# Altium PCB CH32V307VC-SIZE-M.PcbDoc
Units mil, origin at the board's own origin, x right, y up, seen from the top; angles counter-clockwise.
Board outline 2461 x 1760 mil, 2 copper layers (Top Layer, Bottom Layer), stack 12.8 mil thick; 25 components, 0 nets, 315 pads, 0 vias.
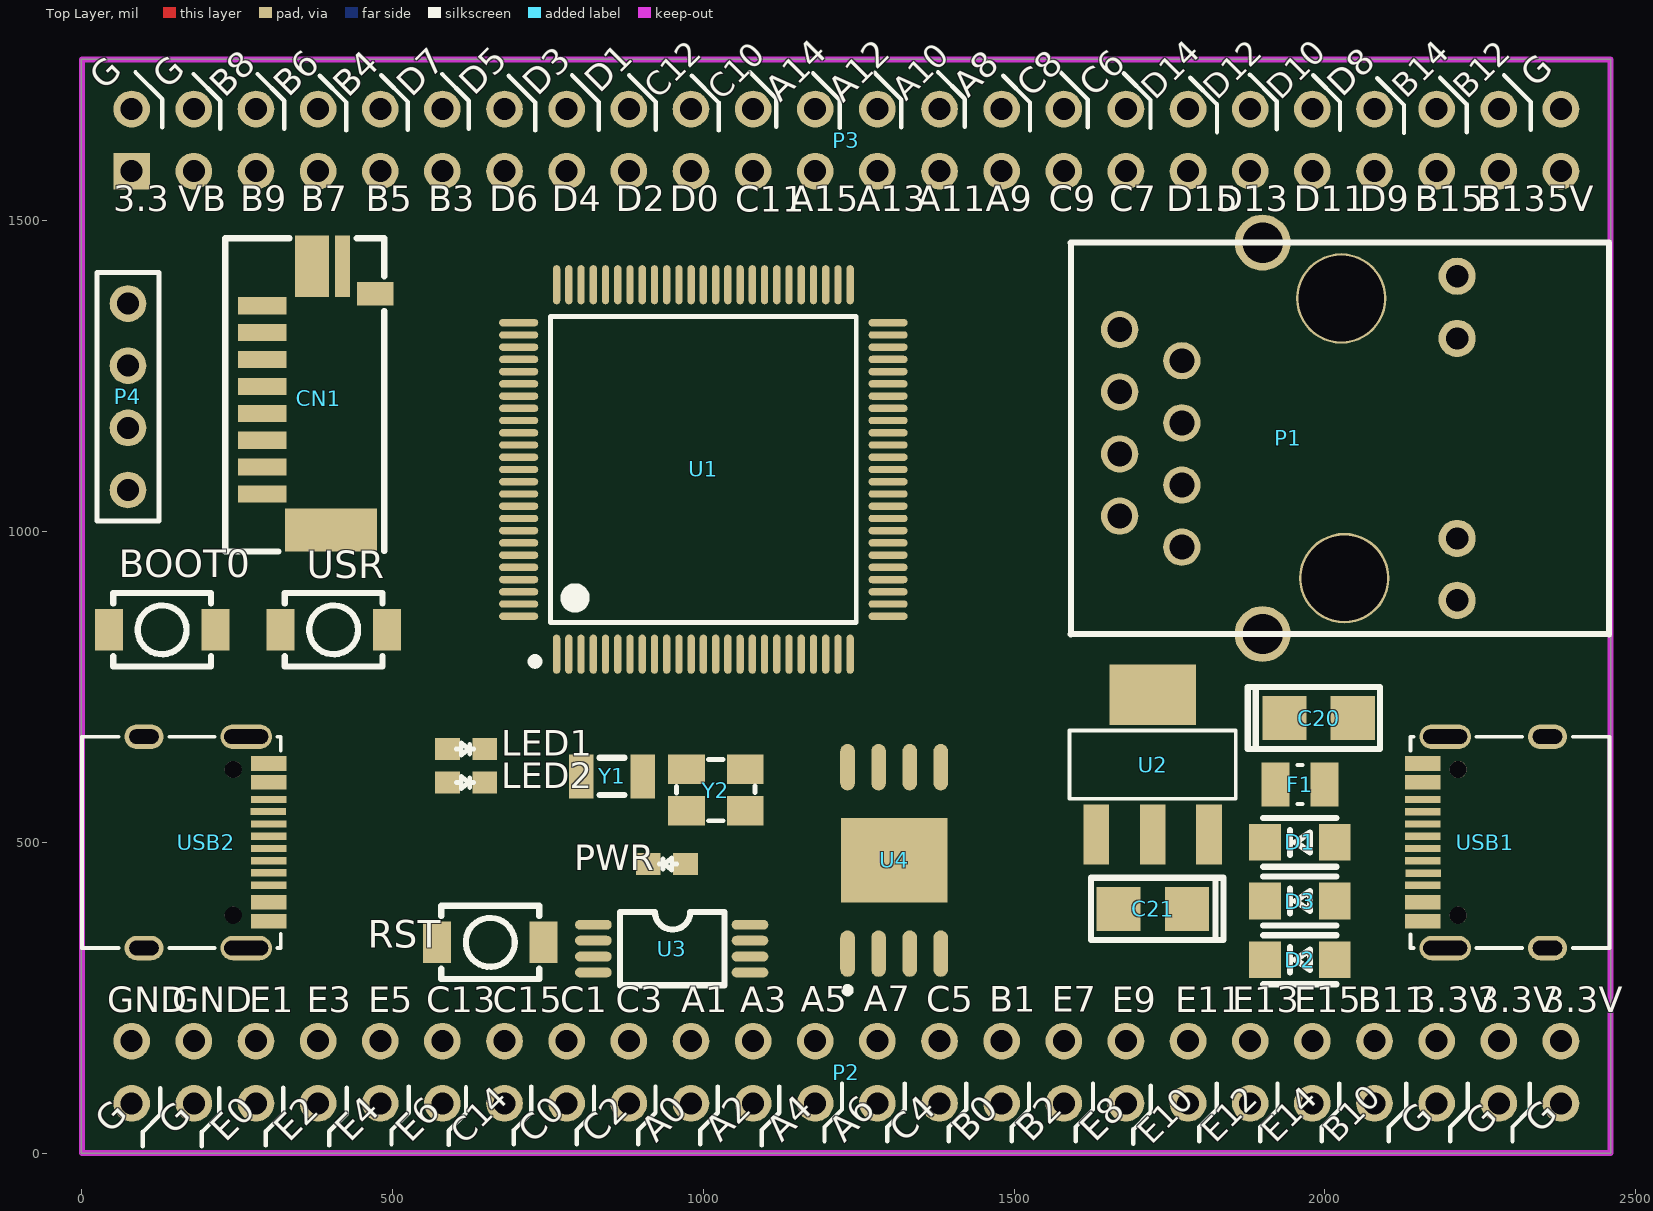
[diagram p0: Top Layer view]
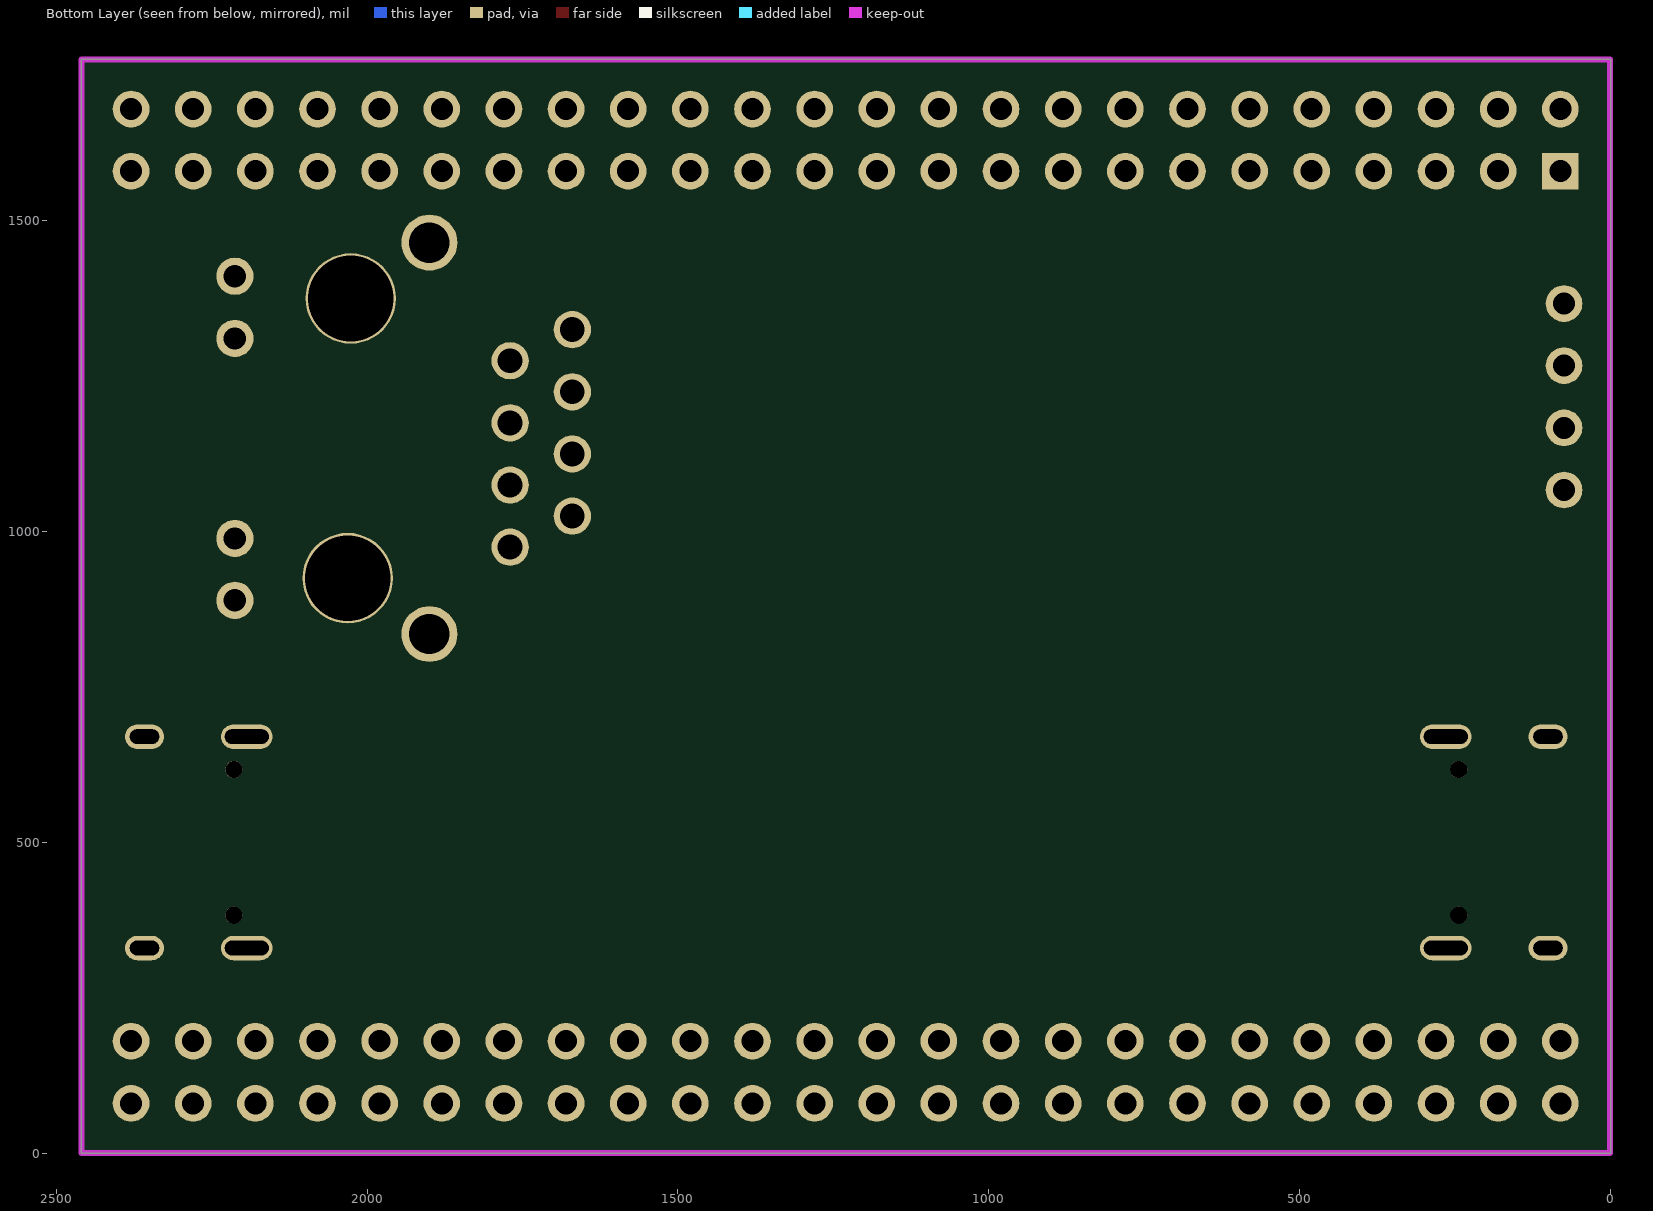
[diagram p1: Bottom Layer view, seen from below]

## Layer stack, top to bottom
Top Solder: solder mask 0.4, Solder Resist, Dk 3.5
Top Layer: signal copper 1.4
Dielectric 1: core 10, FR-4, Dk 4.2
Bottom Layer: signal copper 1.4
Bottom Solder: solder mask 0.4, Solder Resist, Dk 3.5

## Board outline
2207,0 -1,0 -1,627 -1,1760 543,1760 2460,1760 2460,0

## Design rules (kind name [scope] priority, off if disabled: settings)
Clearance [All] p1: gap=6 ignorepadtopadclearanceinfootprint=FALSE
ComponentClearance [All] p1: gap=0 collisioncheckmode=3 verticalgap=0 showdistances=FALSE
HoleToHoleClearance [All] p1: gap=0 allowstackedmicrovias=TRUE
Length "InNet('FMC_A3') Or InNet('FMC_A1')" [InNet('FMC_A3') Or InNet('FMC_A1')] p1: maxlimit=2088.86 minlimit=2000
MinimumSolderMaskSliver [All] p1: minsoldermaskwidth=0
PolygonConnect [(InPadClass('All Pads'))] p1: connectstyle=Relief reliefconductorwidth=20 reliefentries=4 polygonreliefangle="90 Angle" airgapwidth=10
PolygonConnect PolygonConnect_1 [All] p2: connectstyle=Direct reliefconductorwidth=10 reliefentries=4 polygonreliefangle="90 Angle" airgapwidth=10
RoutingVias [All] p1: holewidth=28 width=50 viastyle="Through Hole" minholewidth=28 minwidth=50 maxholewidth=28 maxwidth=50
SilkToSilkClearance [All] p1: silktosilkclearance=0
SilkToSolderMaskClearance [IsPad] p1: minsilkscreentomaskgap=0 clearancetoexposedcopper=TRUE
SolderMaskExpansion [All] p1: expansion=4 istentingtop=FALSE
Width [All] p1: maxlimit=50 minlimit=7 preferedwidth=10
25 further rules are at their usual default settings.

## Classes and differential pairs
component class CH32V307VC: BOOT0 CN1 LED1 LED2 P1 P2 P3 P4 PWR RST U1 U2 U3 U4 USB1 USB2 USR Y1 Y2

## Components (designator, comment, footprint, x,y, rotation, side; value= is the part's Value field where it differs from the comment)
BOOT0 "ST-1185S" SW-SMD_ST-1185S 129,842 r0 top
C20 "10uF ±20% 16V" A 1990,700 r180 top
C21 "22uF ±20% 16V" A 1723,393 r0 top
CN1 "MicroSD" MOLEX-SD-105027-PKG 380,1220 r90 top locked
D1 "SM4007PL" SOD-123FL 1960,500 r180 top
D2 "SM4007PL" SOD-123FL 1960,311 r180 top
D3 "SM4007PL" SOD-123FL 1960,405.5 r180 top
F1 "MF-MSMF050-2 500mA" F0805 1960,593 r0 top
LED1 "LED-R" LED0603 618.31,650 r0 top
LED2 "LED-G" LED0603 618.31,596.13 r0 top
P1 "HR911105A" RJ45A 1770,975 r90 top locked
P2 "Header 24X2" HDR2X24#1 80,80 r0 top locked
P3 "Header 24X2" HDR2X24#2 80,1580 r0 top locked
P4 "4P,SWD" HDR1X4 74,1367 r270 top
PWR "LED-R" LED0603 941.08,465 r180 top
RST "ST-1185S" SW-SMD_ST-1185S 657,339 r0 top
U1 "CH32V307VCT6" LQFP-100_L14.0-W14.0-P0.50-LS16.0-BL 1000,1100 r0 top locked
U2 "AMS1117-33" SOT-223_L6.5-W3.5-P2.30-LS7.0-BR 1723,625 r270 top
U3 "FT24C32A-ETR-T" TSSOP-8_L4.4-W3.0-P0.65-LS6.4-BL-2 949,329 r270 top
U4 "W25Qxxx" VSOP-8 1307,471 r90 top locked
USB1 "TYPEC-304-BCP16" USB-C-SMD_TYPEC-304-BCP16 2258,500 r90 top locked
USB2 "TYPEC-304-BCP16" USB-C-SMD_TYPEC-304-BCP16 200,500 r270 top locked
USR "ST-1185S" SW-SMD_ST-1185S 405,842 r180 top
Y1 "32.768kHz" FC-135R_L3.2-W1.5 853,606 r180 top
Y2 "8MHz" 3225-4p 1020,584 r0 top

## Footprints (in the part's own frame and the unit in brackets; to place one, negate y for a bottom-side part, rotate by r counter-clockwise, add the part's x,y. Pads: shape width x height; smd on the part's side, far side on the other; paste and mask are expansions set on the pad)
3225-4p [mm]
  rect 1.5x1.2 smd: 1(-1.2,-0.85) 2(1.2,-0.85) 3(1.2,0.85) 4(-1.2,0.85)
  silkscreen extent -1.6,-1.25 1.6,1.25
A [mm]
  rect 1.8x1.8 smd: 1(1.397,0) 2(-1.397,0)
  silkscreen extent -2.51,-1.27 2.9,1.27
F0805 [mm] "0805 / 1.45mm height"
  rect 1.15x1.8 smd: 1(-1,0) 2(1,0)
  silkscreen extent -0.1,-0.8 0.1,0.8
FC-135R_L3.2-W1.5 [mm]
  rect 1x1.8 smd: 1(-1.25,0) 2(1.25,0)
  silkscreen extent -0.51,-0.76 0.51,0.76
HDR1X4 [mm] "Connector; Header; 4 Position"
  round 1.5 hole 0.9: 1(0,0) 2(2.54,0) 3(5.08,0) 4(7.62,0)
  silkscreen extent -1.27,-1.27 8.89,1.27
HDR2X24#1 [mm] "Connector; Header; 24x2 Position"
  round 1.5 hole 0.9: 1(0,0) 2(0,2.54) 3(2.54,0) 4(2.54,2.54) 5(5.08,0) 6(5.08,2.54) 7(7.62,0) 8(7.62,2.54) 9(10.16,0) 10(10.16,2.54) 11(12.7,0) 12(12.7,2.54) 13(15.24,0) 14(15.24,2.54) 15(17.78,0) 16(17.78,2.54) 17(20.32,0) 18(20.32,2.54) 19(22.86,0) 20(22.86,2.54) 21(25.4,0) 22(25.4,2.54) 23(27.94,0) 24(27.94,2.54) 25(30.48,0) 26(30.48,2.54) 27(33.02,0) 28(33.02,2.54) 29(35.56,0) 30(35.56,2.54) 31(38.1,0) 32(38.1,2.54) 33(40.64,0) 34(40.64,2.54) 35(43.18,0) 36(43.18,2.54) 37(45.72,0) 38(45.72,2.54) 39(48.26,0) 40(48.26,2.54) 41(50.8,0) 42(50.8,2.54) 43(53.34,0) 44(53.34,2.54) 45(55.88,0) 46(55.88,2.54) 47(58.42,0) 48(58.42,2.54)
HDR2X24#2 [mm] "Connector; Header; 24x2 Position"
  rect 1.5x1.5 hole 0.9: 1(0,0)
  round 1.5 hole 0.9: 2(0,2.54) 3(2.54,0) 4(2.54,2.54) 5(5.08,0) 6(5.08,2.54) 7(7.62,0) 8(7.62,2.54) 9(10.16,0) 10(10.16,2.54) 11(12.7,0) 12(12.7,2.54) 13(15.24,0) 14(15.24,2.54) 15(17.78,0) 16(17.78,2.54) 17(20.32,0) 18(20.32,2.54) 19(22.86,0) 20(22.86,2.54) 21(25.4,0) 22(25.4,2.54) 23(27.94,0) 24(27.94,2.54) 25(30.48,0) 26(30.48,2.54) 27(33.02,0) 28(33.02,2.54) 29(35.56,0) 30(35.56,2.54) 31(38.1,0) 32(38.1,2.54) 33(40.64,0) 34(40.64,2.54) 35(43.18,0) 36(43.18,2.54) 37(45.72,0) 38(45.72,2.54) 39(48.26,0) 40(48.26,2.54) 41(50.8,0) 42(50.8,2.54) 43(53.34,0) 44(53.34,2.54) 45(55.88,0) 46(55.88,2.54) 47(58.42,0) 48(58.42,2.54)
LED0603 [mil]
  rect 40x35 smd: 1(-29.92,0) 2(29.92,0)
  silkscreen extent -16,-10 12,10
LQFP-100_L14.0-W14.0-P0.50-LS16.0-BL [mm]
  oval 0.3x1.6 smd: 1(-6,-7.55) 2(-5.5,-7.55) 3(-5,-7.55) 4(-4.5,-7.55) 5(-4,-7.55) 6(-3.5,-7.55) 7(-3,-7.55) 8(-2.5,-7.55) 9(-2,-7.55) 10(-1.5,-7.55) 11(-1,-7.55) 12(-0.5,-7.55) 13(0,-7.55) 14(0.5,-7.55) 15(1,-7.55) 16(1.5,-7.55) 17(2,-7.55) 18(2.5,-7.55) 19(3,-7.55) 20(3.5,-7.55) 21(4,-7.55) 22(4.5,-7.55) 23(5,-7.55) 24(5.5,-7.55) 25(6,-7.55) 51(6,7.55) 52(5.5,7.55) 53(5,7.55) 54(4.5,7.55) 55(4,7.55) 56(3.5,7.55) 57(3,7.55) 58(2.5,7.55) 59(2,7.55) 60(1.5,7.55) 61(1,7.55) 62(0.5,7.55) 63(0,7.55) 64(-0.5,7.55) 65(-1,7.55) 66(-1.5,7.55) 67(-2,7.55) 68(-2.5,7.55) 69(-3,7.55) 70(-3.5,7.55) 71(-4,7.55) 72(-4.5,7.55) 73(-5,7.55) 74(-5.5,7.55) 75(-6,7.55)
  oval 1.6x0.3 smd: 26(7.55,-6) 27(7.55,-5.5) 28(7.55,-5) 29(7.55,-4.5) 30(7.55,-4) 31(7.55,-3.5) 32(7.55,-3) 33(7.55,-2.5) 34(7.55,-2) 35(7.55,-1.5) 36(7.55,-1) 37(7.55,-0.5) 38(7.55,0) 39(7.55,0.5) 40(7.55,1) 41(7.55,1.5) 42(7.55,2) 43(7.55,2.5) 44(7.55,3) 45(7.55,3.5) 46(7.55,4) 47(7.55,4.5) 48(7.55,5) 49(7.55,5.5) 50(7.55,6) 76(-7.55,6) 77(-7.55,5.5) 78(-7.55,5) 79(-7.55,4.5) 80(-7.55,4) 81(-7.55,3.5) 82(-7.55,3) 83(-7.55,2.5) 84(-7.55,2) 85(-7.55,1.5) 86(-7.55,1) 87(-7.55,0.5) 88(-7.55,0) 89(-7.55,-0.5) 90(-7.55,-1) 91(-7.55,-1.5) 92(-7.55,-2) 93(-7.55,-2.5) 94(-7.55,-3) 95(-7.55,-3.5) 96(-7.55,-4) 97(-7.55,-4.5) 98(-7.55,-5) 99(-7.55,-5.5) 100(-7.55,-6)
  silkscreen extent -7.03,-8 6.25,6.25
MOLEX-SD-105027-PKG [mm] "MOLEX-SD-105027-PKG"
  rect 0.7x2 smd: 1(3.647,2.284) 2(2.547,2.284) 3(1.447,2.284) 4(0.347,2.284) 5(-0.753,2.284) 6(-1.853,2.284) 7(-2.953,2.284) 8(-4.053,2.284)
  rect 2.5x1.4 smd: G1(5.258,0.254)
  rect 1.75x3.75 smd: G2(-5.522,-0.525)
  rect 0.95x1.5 smd: G3(4.14,-2.337)
  rect 2.5x0.6 smd: G4(5.258,-1)
  silkscreen extent -6.4,-2.7 6.4,3.8
RJ45A [mil]
  round 145.67 hole 137.8: 0(-49.8,-261.46) 0(400.2,-256.46)
  round 60 hole 40: 1(0,0) 2(50,100) 3(100,0) 4(150,100) 5(200,0) 6(250,100) 7(300,0) 8(350,100)
  round 60 hole 36: 9(-85.63,-442.91) 10(14,-442.91) 11(335.87,-442.91) 12(436,-442.91)
  round 90 hole 65: 13(490.16,-129.92) 14(-139.76,-129.92)
  silkscreen extent -140,-687 490,179
SOD-123FL [mil]
  rect 51.18x59.06 smd: 1(-56,0) 2(56,0)
  silkscreen extent -59,-39 59,39
SOT-223_L6.5-W3.5-P2.30-LS7.0-BR [mm]
  rect 2.465x1.05 smd: 1(2.858,-2.3) 2(2.857,0) 3(2.857,2.3)
  rect 2.465x3.54 smd: 4(-2.857,0)
  silkscreen extent -1.4,-3.4 1.4,3.4
SW-SMD_ST-1185S [mm]
  rect 1.15x1.7 smd: 1(-2.175,0) 2(2.175,0)
  silkscreen extent -2,-1.5 2,1.5
TSSOP-8_L4.4-W3.0-P0.65-LS6.4-BL-2 [mm]
  oval 0.4x1.5 smd: 1(-0.975,-3.2) 2(-0.325,-3.2) 3(0.325,-3.2) 4(0.975,-3.2) 5(0.975,3.2) 6(0.325,3.2) 7(-0.325,3.2) 8(-0.975,3.2)
  silkscreen extent -1.5,-2.11 1.5,2.16
USB-C-SMD_TYPEC-304-BCP16 [mm]
  oval 1x2.1 hole 0.6 slot 1.8 at 90 deg: 13(-4.32,1.633) 14(4.32,1.633)
  oval 1x1.6 hole 0.6 slot 1.2 at 90 deg: 15(-4.32,-2.547) 16(4.32,-2.547)
  rect 0.6x1.45 smd: A1B12(-3.225,2.547) A4B9(-2.45,2.547) B1A12(3.22,2.547) B4A9(2.45,2.547)
  rect 0.3x1.45 smd: A5(-1.26,2.532) A6(-0.25,2.547) A7(0.25,2.547) A8(1.25,2.547) B5(1.75,2.547) B6(0.75,2.547) B7(-0.75,2.547) B8(-1.75,2.547)
  round 0.7 hole 0.7 unplated: ""(-2.98,1.102) ""(2.98,1.102)
  silkscreen extent -4.32,-5.08 4.32,3.05, body extent -4.51,-5.15 4.45,2.61, height 7.58
VSOP-8 [mm]
  oval 1.9x0.6 smd: 1(-3.81,1.905) 2(-3.81,0.635) 3(-3.81,-0.635) 4(-3.81,-1.905) 5(3.81,-1.905) 6(3.81,-0.635) 7(3.81,0.635) 8(3.81,1.905)
  rect 3.45x4.35 smd: 9(0,0)
  silkscreen extent -5.43,1.78 -5.18,2.03

## Part data
BOOT0 RST USR: BOM_JLCPCB Part Class="Extended Part", BOM_Manufacturer="RI SHENG", BOM_Manufacturer Part=ST-1185S, BOM_Supplier=LCSC, BOM_Supplier Part=C589191, Contributor=LCSC, spicePre=S, spiceSymbolName=ST-1185S
C20 C21: library part "Cap Pol1", "Polarized Capacitor (Radial)", LatestRevisionDate=17-Jul-2002, LatestRevisionNote="Re-released for DXP Platform.", PackageReference=RB7.6-15, Published=8-Jun-2000, Publisher="Altium Limited"
CN1: library part SMS016AFA5E
D1 D2 D3: library part D, "1N4148"
F1: library part L, "BLM21"
LED1 PWR: library part LED-RED
LED2: library part LED-GREEN
P2 P3: "Header, 24-Pin, Dual row", LatestRevisionDate=17-Jul-2002, LatestRevisionNote="Re-released for DXP Platform.", Publisher="Altium Limited"
P4: library part "Header 4", "Header, 4-Pin", LatestRevisionDate=17-Jul-2002, LatestRevisionNote="Re-released for DXP Platform.", Publisher="Altium Limited"
U1: BOM_Manufacturer=WCH(南京沁恒), BOM_Manufacturer Part=CH32V307VCT6, BOM_Supplier=LCSC, BOM_Supplier Part=C2943979, Contributor=LCSC, spicePre=U, spiceSymbolName=CH32V307VCT6
U2: library part REG1117-3.3, "800mA and 1A Low Dropout Positive Regulator 2.85V, 3.3V, 5V, and Adjustable", ComponentLink1Description="Manufacturer Link", ComponentLink1URL=http://www.ti.com/, ComponentLink2Description=Datasheet, ComponentLink2URL=http://www-s.ti.com/sc/ds/REG1117.pdf, DatasheetVersion=Sep-1997, LatestRevisionDate=17-Jul-2002, LatestRevisionNote="Re-released for DXP Platform.", PackageDescription="SOT-223/SC-73; 4 Leads; Body 6.7 x 7.3 mm, inc. leads (LxW max)", PackageReference=ZZ311, PackageVersion=revC, Published=8-Jun-2000, Publisher="Altium Limited"
U3: library part FT24C256A-ETR-T, BOM_JLCPCB Part Class="Extended Part", BOM_Manufacturer="Fremont Micro Devices", BOM_Manufacturer Part=FT24C256A-ETR-T, BOM_Supplier=LCSC, BOM_Supplier Part=C232880, Contributor=LCSC, spicePre=U, spiceSymbolName=FT24C256A-ETR-T
U4: library part W25Q256JVEIQTR, BOM_Manufacturer="Winbond Elec", BOM_Manufacturer Part=W25Q256JVEIQTR, BOM_Supplier=LCSC, BOM_Supplier Part=C97522, Contributor=LCSC, spicePre=U
USB1 USB2: BOM_Manufacturer=XUNPU, BOM_Manufacturer Part=TYPEC-304-BCP16, BOM_Supplier=LCSC, BOM_Supplier Part=C720629, Contributor=LCSC, spicePre=U, spiceSymbolName=TYPEC-304-BCP16
Y1: library part XTAL, LatestRevisionDate=17-Jul-2002, LatestRevisionNote="Re-released for DXP Platform.", Published=8-Jun-2000, Publisher="Altium Limited"
Y2: library part CRYSTAL

## Nets (pads, with @x,y where several pads share a name; then routed paths per layer and width w, separated by ;. In a path a pad name is that pad's centre, name@x,y a point inside that pad or via, vN(x,y) a via of type N, cw(c..) or ccw(c..) an arc to the next point about the centre after c; other vN are vias at no path point)
pads on no net: BOOT0.1 BOOT0.2 C20.1 C20.2 C21.1 C21.2 CN1.1 CN1.2 CN1.3 CN1.4 CN1.5 CN1.6 CN1.7 CN1.8 CN1.G1 CN1.G2 CN1.G3 CN1.G4 D1.1 D1.2 D2.1 D2.2 D3.1 D3.2 F1.1 F1.2 LED1.1 LED1.2 LED2.1 LED2.2 P1.0 P1.1 P1.2 P1.3 P1.4 P1.5 P1.6 P1.7 P1.8 P1.9 P1.10 P1.11 P1.12 P1.13 P1.14 P2.1 P2.2 P2.3 P2.4 P2.5 P2.6 P2.7 P2.8 P2.9 P2.10 P2.11 P2.12 P2.13 P2.14 P2.15 P2.16 P2.17 P2.18 P2.19 P2.20 P2.21 P2.22 P2.23 P2.24 P2.25 P2.26 P2.27 P2.28 P2.29 P2.30 P2.31 P2.32 P2.33 P2.34 P2.35 P2.36 P2.37 P2.38 P2.39 P2.40 P2.41 P2.42 P2.43 P2.44 P2.45 P2.46 P2.47 P2.48 P3.1 P3.2 P3.3 P3.4 P3.5 P3.6 P3.7 P3.8 P3.9 P3.10 P3.11 P3.12 P3.13 P3.14 P3.15 P3.16 P3.17 P3.18 P3.19 P3.20 P3.21 P3.22 P3.23 P3.24 P3.25 P3.26 P3.27 P3.28 P3.29 P3.30 P3.31 P3.32 P3.33 P3.34 P3.35 P3.36 P3.37 P3.38 P3.39 P3.40 P3.41 P3.42 P3.43 P3.44 P3.45 P3.46 P3.47 P3.48 P4.1 P4.2 P4.3 P4.4 PWR.1 PWR.2 RST.1 RST.2 U1.1 U1.2 U1.3 U1.4 U1.5 U1.6 U1.7 U1.8 U1.9 U1.10 U1.11 U1.12 U1.13 U1.14 U1.15 U1.16 U1.17 U1.18 U1.19 U1.20 U1.21 U1.22 U1.23 U1.24 U1.25 U1.26 U1.27 U1.28 U1.29 U1.30 U1.31 U1.32 U1.33 U1.34 U1.35 U1.36 U1.37 U1.38 U1.39 U1.40 U1.41 U1.42 U1.43 U1.44 U1.45 U1.46 U1.47 U1.48 U1.49 U1.50 U1.51 U1.52 U1.53 U1.54 U1.55 U1.56 U1.57 U1.58 U1.59 U1.60 U1.61 U1.62 U1.63 U1.64 U1.65 U1.66 U1.67 U1.68 U1.69 U1.70 U1.71 U1.72 U1.73 U1.74 U1.75 U1.76 U1.77 U1.78 U1.79 U1.80 U1.81 U1.82 U1.83 U1.84 U1.85 U1.86 U1.87 U1.88 U1.89 U1.90 U1.91 U1.92 U1.93 U1.94 U1.95 U1.96 U1.97 U1.98 U1.99 U1.100 U2.1 U2.2 U2.3 U2.4 U3.1 U3.2 U3.3 U3.4 U3.5 U3.6 U3.7 U3.8 U4.1 U4.2 U4.3 U4.4 U4.5 U4.6 U4.7 U4.8 U4.9 USB1. USB1.13 USB1.14 USB1.15 USB1.16 USB1.A1B12 USB1.A4B9 USB1.A5 USB1.A6 USB1.A7 USB1.A8 USB1.B1A12 USB1.B4A9 USB1.B5 USB1.B6 USB1.B7 USB1.B8 USB2. USB2.13 USB2.14 USB2.15 USB2.16 USB2.A1B12 USB2.A4B9 USB2.A5 USB2.A6 USB2.A7 USB2.A8 USB2.B1A12 USB2.B4A9 USB2.B5 USB2.B6 USB2.B7 USB2.B8 USR.1 USR.2 Y1.1 Y1.2 Y2.1 Y2.2 Y2.3 Y2.4

## Polygon pours and split planes (outlines as drawn)
no net on Top Layer "NONET_L01_P001" (solid, pour order 1): 1321,1760
no net on Top Layer "NONET_L01_P000" (solid, pour order 0): 843,1760

## Keep-outs
Keep-Out Layer:
  lines w10: 0,0 2460,0 2460,1760 0,1760 0,0

## Silkscreen, mask and mechanical layers (free items; w line width, h text height)
Top Overlay:
  lines w7: 86,1739 129,1696 129,1651 ; 98,11 98,34 126,62 126,104 ; 179.5,1736.5 222.5,1693.5 222.5,1648.5 ; 193,11 193,34 221,62 221,104 ; 282.5,1736.5 325.5,1693.5 325.5,1648.5 ; 296,12 296,35 324,63 324,105 ; 382.5,1733.5 425.5,1690.5 425.5,1645.5 ; 398,12 398,35 426,63 426,105 ; 481.5,1734.5 524.5,1691.5 524.5,1646.5 ; 498,14 498,37 526,65 526,107 ; 579.5,1736.5 622.5,1693.5 622.5,1648.5 ; 590,13 590,36 618,64 618,106 ; 686.5,1733.5 729.5,1690.5 729.5,1645.5 ; 695,14 695,37 723,65 723,107 ; 788.5,1734.5 831.5,1691.5 831.5,1646.5 ; 796,14 796,37 824,65 824,107 ; 880.5,1734.5 923.5,1691.5 923.5,1646.5 ; 895,14 895,37 923,65 923,107 ; 981.5,1733.5 1024.5,1690.5 1024.5,1645.5 ; 995,14 995,37 1023,65 1023,107 ; 1074.5,1739.5 1117.5,1696.5 1117.5,1651.5 ; 1094,12 1094,24 1094,37 1122,65 1122,107 ; 1176.5,1737.5 1219.5,1694.5 1219.5,1649.5 ; 1195,19 1195,42 1223,70 1223,112 ; 1275.5,1738.5 1318.5,1695.5 1318.5,1650.5 ; 1296,19 1296,42 1324,70 1324,112 ; 1377.5,1739.5 1420.5,1696.5 1420.5,1651.5 ; 1395,19 1395,42 1423,70 1423,112 ; 1482.5,1733.5 1525.5,1690.5 1525.5,1645.5 ; 1496,19 1496,42 1524,70 1524,112 ; 1575.5,1738.5 1618.5,1695.5 1618.5,1650.5 ; 1599,19 1599,42 1627,70 1627,112 ; 1676.5,1737.5 1719.5,1694.5 1719.5,1649.5 ; 1692,15 1692,38 1720,66 1720,108 ; 1783.5,1730.5 1826.5,1687.5 1826.5,1642.5 ; 1798,19 1798,42 1826,70 1826,112 ; 1879.5,1735.5 1922.5,1692.5 1922.5,1647.5 ; 1896,19 1896,42 1924,70 1924,112 ; 1981.5,1734.5 2024.5,1691.5 2024.5,1646.5 ; 1995,19 1995,42 2023,70 2023,112 ; 2084.5,1729.5 2127.5,1686.5 2127.5,1641.5 ; 2103,19 2103,42 2131,70 2131,112 ; 2185.5,1730.5 2228.5,1687.5 2228.5,1642.5 ; 2202,19 2202,42 2230,70 2230,112 ; 2288.5,1734.5 2331.5,1691.5 2331.5,1646.5 ; 2302,19 2302,42 2330,70 2330,112
  text "G" at 2349,1703 h70 r45
  text "G" at 148,1701 h70 r45
  text "G" at 46,1699 h70 r45
  text "D1" at 843,1694 h70 r45
  text "D5" at 641,1690 h70 r45
  text "D3" at 743,1689 h70 r45
  text "B6" at 342,1688 h70 r45
  text "D7" at 540,1688 h70 r45
  text "C6" at 1639,1688 h70 r45
  text "D8" at 2038,1688 h70 r45
  text "B8" at 239,1687 h70 r45
  text "B4" at 438,1687 h70 r45
  text "A8" at 1436,1687 h70 r45
  text "C8" at 1538,1687 h70 r45
  text "B14" at 2140,1686 h65 r45
  text "C12" at 936,1685 h65 r45
  text "B12" at 2238,1685 h65 r45
  text "D14" at 1736,1684 h65 r45
  text "D12" at 1836,1684 h65 r45
  text "D10" at 1938,1684 h65 r45
  text "C10" at 1038,1683 h65 r45
  text "A10" at 1335,1682 h65 r45
  text "A14" at 1133,1680 h70 r45
  text "A12" at 1235,1679 h70 r45
  text "3.3" at 50,1502 h70
  text "VB" at 155,1502 h70
  text "B9" at 255,1502 h70
  text "B7" at 352,1502 h70
  text "B5" at 457,1502 h70
  text "B3" at 557,1502 h70
  text "D6" at 655,1502 h70
  text "D4" at 756,1502 h70
  text "D2" at 859,1502 h70
  text "D0" at 946,1502 h70
  text "A15" at 1139,1502 h70
  text "A13" at 1247,1502 h70
  text "A11" at 1343,1502 h70
  text "A9" at 1454,1502 h70
  text "C9" at 1556,1502 h70
  text "C7" at 1653,1502 h70
  text "D15" at 1745,1502 h70
  text "D13" at 1825,1502 h70
  text "D11" at 1950,1502 h70
  text "D9" at 2056,1502 h70
  text "B15" at 2145,1502 h70
  text "B13" at 2245,1502 h70
  text "5V" at 2358,1502.07 h70
  text "C11" at 1051,1501 h70
  text "A7" at 1258,214.61 h70
  text "A5" at 1157,214 h70
  text "C5" at 1359,214 h70
  text "B1" at 1460,214 h70
  text "E7" at 1561,214 h70
  text "GND" at 41,213 h70
  text "GND" at 145,213 h70
  text "E1" at 269,213 h70
  text "E3" at 362,213 h70
  text "E5" at 461,213 h70
  text "C13" at 554,213 h70
  text "C15" at 661,213 h70
  text "C1" at 770,213 h70
  text "C3" at 859,213 h70
  text "A1" at 964,213 h70
  text "A3" at 1059,213 h70
  text "E9" at 1657,213 h70
  text "E11" at 1759,213 h70
  text "E13" at 1851,213 h70
  text "E15" at 1951,213 h70
  text "B11" at 2053,213 h70
  text "3.3V" at 2143,213.07 h70
  text "3.3V" at 2245,213.07 h70
  text "3.3V" at 2351,213.07 h70
  text "G" at 55,20 h70 r45
  text "G" at 2356,20 h70 r45
  text "G" at 157,17 h70 r45
  text "G" at 2156,16 h70 r45
  text "G" at 2260,15 h70 r45
  text "E0" at 241,6 h70 r45
  text "E2" at 343,6 h70 r45
  text "E4" at 441,6 h70 r45
  text "A2" at 1037,6 h70 r45
  text "A4" at 1136,6 h70 r45
  text "B0" at 1434,6 h70 r45
  text "B2" at 1537,6 h70 r45
  text "E8" at 1640,6 h70 r45
  text "E6" at 539,5 h70 r45
  text "A0" at 934,5 h70 r45
  text "A6" at 1236,5 h70 r45
  text "C4" at 1334,5 h70 r45
  text "E12" at 1833,5 h65 r45
  text "E14" at 1930,5 h65 r45
  text "B10" at 2029,5 h65 r45
  text "C0" at 736,4 h70 r45
  text "C2" at 838,4 h70 r45
  text "C14" at 625,3 h65 r45
  text "E10" at 1730,3 h65 r45

## Dimensions
80,180 to 80,1580 on Top Overlay
80,1680 to 80,80 on Top Overlay
80,1680 to 2380,1680 on Top Overlay
0,1760 to 0,0 on Top Overlay
0,1760 to 2460,1760 on Top Overlay